# Altium PCB hexling_logic.PcbDoc
Units mil, origin at the board's own origin, x right, y up, seen from the top; angles counter-clockwise.
Board outline 1166 x 4200 mil, 2 copper layers (Top Layer, Bottom Layer), stack 62.086 mil thick; 49 components, 44 nets, 189 pads, 45 vias.
Unrouted connection lines stored in the file: 46.
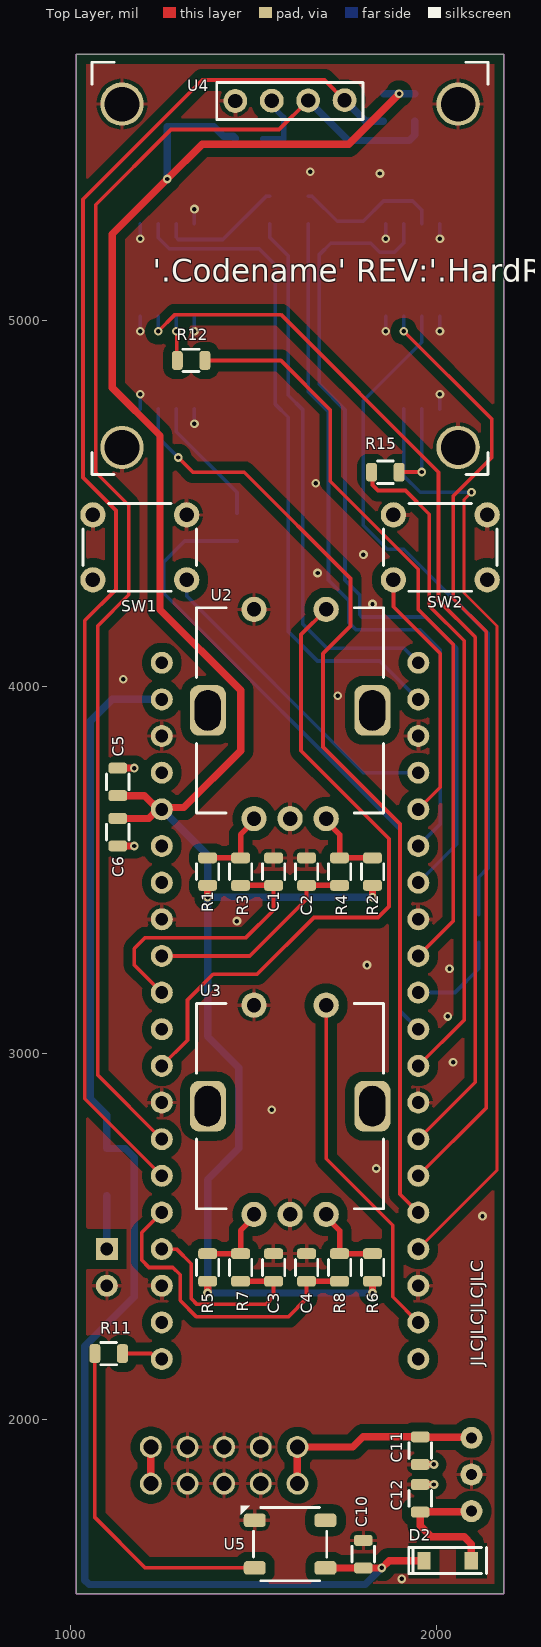
[diagram p0: Top Layer view]
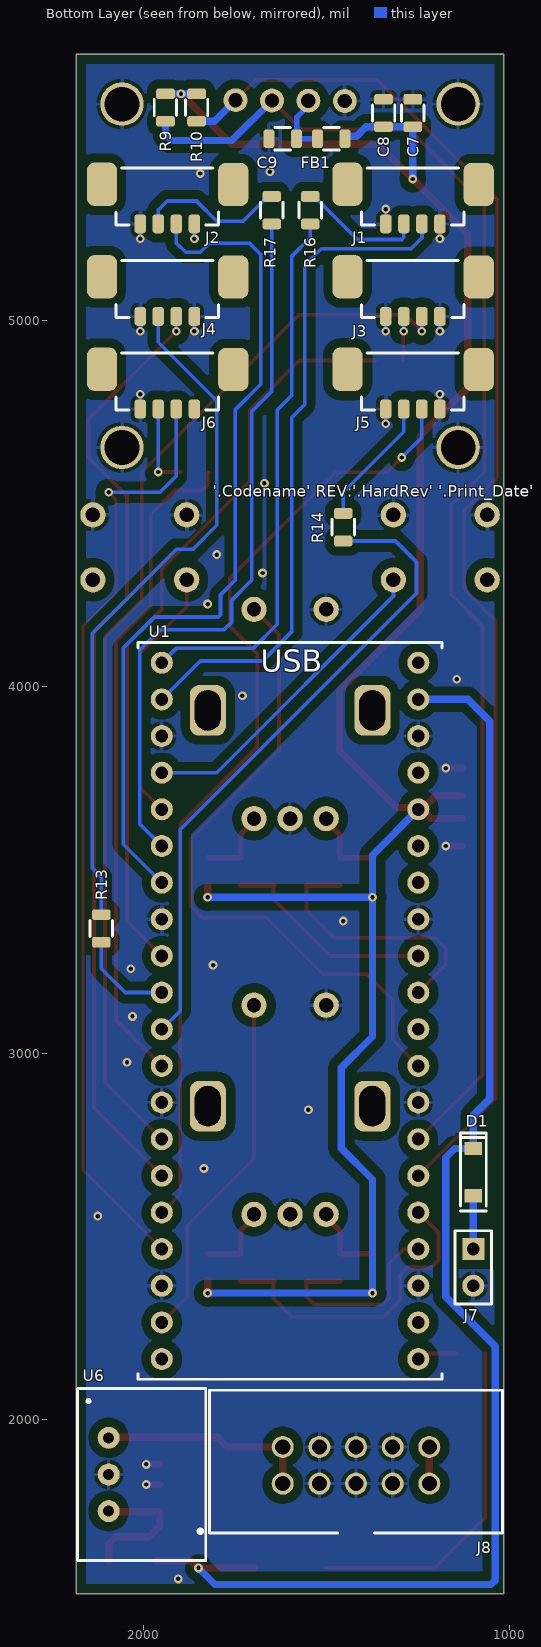
[diagram p1: Bottom Layer view, seen from below]
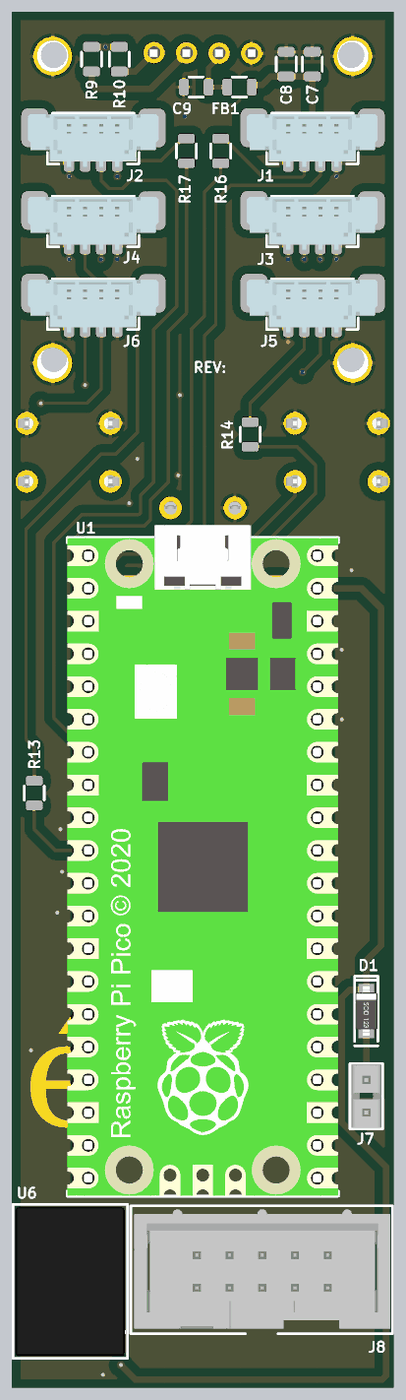
[diagram p2: 3D render of the assembled board from below, using the file's embedded part models]

## Layer stack, top to bottom
Top Solder: solder mask 0.4, Solder Resist, Dk 3.5
Top Layer: signal copper 1.4
Dielectric 1: dielectric 59.2858, FR-4, Dk 4.8
Bottom Layer: signal copper 1.4
Bottom Solder: solder mask 0.4, Solder Resist, Dk 3.5

## Board outline
1017,1525 2183,1525 2183,5725 1017,5725

## Design rules (kind name [scope] priority, off if disabled: settings)
Clearance Clearance_HS [InDifferentialPairClass('DIFF90') vs InPoly] p1: gap=75 ignorepadtopadclearanceinfootprint=FALSE
Clearance Clearance_Poly [All vs InPoly] p2: gap=25 ignorepadtopadclearanceinfootprint=FALSE
Clearance [All] p3: gap=5 ignorepadtopadclearanceinfootprint=FALSE
DiffPairsRouting DIff90 [InDifferentialPairClass('DIFF90')] p1: maxlimit=10 minlimit=7 mostfreqgap=7 toplayer_minwidth=15 toplayer_maxwidth=25 toplayer_prefwidth=25 bottomlayer_minwidth=15 bottomlayer_maxwidth=25 bottomlayer_prefwidth=25 maxuncoupledlength=75
DiffPairsRouting [All] p2: maxlimit=10 minlimit=10 mostfreqgap=10 toplayer_minwidth=15 toplayer_maxwidth=15 toplayer_prefwidth=15 bottomlayer_minwidth=15 bottomlayer_maxwidth=15 bottomlayer_prefwidth=15 maxuncoupledlength=500
Height [All] p1: minheight=0 maxheight=35835.32 prefheight=0
HoleSize [All] p1: absolutevalues=TRUE maxlimit=99999 minlimit=1 maxpercent=80.000 minpercent=20.000
MinimumSolderMaskSliver [All] p1: minsoldermaskwidth=1.8
PolygonConnect [InAnyComponent] p1: thpad.connectstyle=Relief thpad.reliefconductorwidth=10 thpad.reliefentries=4 thpad.polygonreliefangle="90 Angle" thpad.airgapwidth=10 smdpad.connectstyle=Relief smdpad.reliefconductorwidth=10 smdpad.reliefentries=4 smdpad.polygonreliefangle="90 Angle" smdpad.airgapwidth=10 via.connectstyle=Direct via.reliefconductorwidth=10 via.reliefentries=4 via.polygonreliefangle="90 Angle" via.airgapwidth=10
PolygonConnect "Fall through" [All] p2: connectstyle=Direct reliefconductorwidth=10 reliefentries=4 polygonreliefangle="90 Angle" airgapwidth=10
RoutingVias [All] p1: holewidth=28 width=50 viastyle="Through Hole" minholewidth=28 minwidth=50 maxholewidth=28 maxwidth=50
SilkToSilkClearance [All] p1: silktosilkclearance=0
SilkToSolderMaskClearance [IsPad] p1: minsilkscreentomaskgap=0 clearancetoexposedcopper=TRUE
SolderMaskExpansion [All] p1: expansion=2 istentingtop=FALSE
SupplyNets "Schematic Supply Nets_7" [InNet('VSYS')] p1: voltage=0.000
SupplyNets "Schematic Supply Nets_6" [InNet('-12V')] p2: voltage=0.000
SupplyNets "Schematic Supply Nets_5" [InNet('12V')] p3: voltage=0.000
SupplyNets "Schematic Supply Nets_3" [InNet('3.3V')] p4: voltage=0.000
SupplyNets "Schematic Supply Nets_2" [InNet('USB_VBUS')] p5: voltage=0.000
SupplyNets "Schematic Supply Nets_1" [InNet('GND')] p6: voltage=0.000
SupplyNets "Schematic Supply Nets" [InNet('ADC_VREF')] p7: voltage=0.000
Width [All] p1: maxlimit=300 minlimit=8 preferedwidth=10
24 further rules are at their usual default settings.

## Components (designator, comment, footprint, x,y, rotation, side; value= is the part's Value field where it differs from the comment)
C1 "10000pF" Chip0805 1555,3495 r270 top
C2 "10000pF" Chip0805 1645,3495 r270 top
C3 "10000pF" Chip0805 1555,2415 r270 top
C4 "10000pF" Chip0805 1645,2415 r270 top
C5 "0.1µF" Chip0805 1130,3740 r270 top
C6 "10µF" Chip0805 1130,3602.6 r90 top
C7 "10µF" Chip0805 1265,5565 r270 bottom
C8 "0.1µF" Chip0805 1345,5565 r270 bottom
C9 "0.1µF" Chip0805 1620,5495 r180 bottom
C10 "0.1µF" Chip0805 1800,1632.6 r270 top
C11 "10µF" Chip0805 1955,1915 r90 top
C12 "10µF" Chip0805 1955,1785 r270 top
D1 "1N4148W-7-F" SOD-123 1100,2675 r270 bottom
D2 "1N4148W-7-F" SOD-123 2030,1615 r0 top
FB1 "FERRITE" Chip0805 1487.6,5495 r0 bottom
J1 "0533980471" Molex_0533980471 1265,5330 r180 bottom
J2 "0533980471" Molex_0533980471 1935,5330 r180 bottom
J3 "0533980471" Molex_0533980471 1265,5077.5 r180 bottom
J4 "0533980471" Molex_0533980471 1935,5077.5 r180 bottom
J5 "0533980471" Molex_0533980471 1265,4825 r180 bottom
J6 "0533980471" Molex_0533980471 1935,4825 r180 bottom
J7 "3-644456-2" TE_3-644456-2 1100,2415 r270 bottom
J8 "75869-101LF" IDC_100_2x5 1420,1875 r180 bottom
M1 "JLC_NUMBER" JLC_NUMBER 2430,1980 r90 top
R1 "10k" Chip0805 1375,3495 r270 top
R2 "10k" Chip0805 1825,3495 r270 top
R3 "10k" Chip0805 1465,3495 r270 top
R4 "10k" Chip0805 1735,3495 r270 top
R5 "10k" Chip0805 1375,2415 r270 top
R6 "10k" Chip0805 1825,2415 r270 top
R7 "10k" Chip0805 1465,2415 r270 top
R8 "10k" Chip0805 1735,2415 r270 top
R9 "2.2k" Chip0805 1940,5580 r90 bottom
R10 "2.2k" Chip0805 1855,5580 r90 bottom
R11 "330" Chip0805 1105,2180 r180 top
R12 "330" Chip0805 1330,4890 r180 top
R13 "330" Chip0805 2115,3340 r90 bottom
R14 "330" Chip0805 1455,4435 r90 bottom
R15 "330" Chip0805 1860,4585 r0 top
R16 "330" Chip0805 1545,5300 r90 bottom
R17 "330" Chip0805 1650,5300 r90 bottom
SW1 "TL1105YF160Q" E-Switch_TL1105YF 1190,4380 r0 top
SW2 "TL1105YF160Q" E-Switch_TL1105YF 2010,4380 r0 top
U1 "SC0917" RASPBERRY_PI_PICO_H 1600,3115 r180 bottom locked
U2 "PEC11R-4020F-S0012" BOURNS_PEC11R-4020F-S 1600,3935 r0 top
U3 "PEC11R-4020F-S0012" BOURNS_PEC11R-4020F-S 1600,2855 r0 top
U4 "HS96L03W2C03" HS_HS96L03W2C03 1600,5203.6 r0 top locked
U5 "WS2812B-V5/W" WS2812B 1600,1660 r180 top
U6 "R-78E5.0-0.5" 3-SIP_Module 2095,1850 r270 bottom

## Footprints (in the part's own frame and the unit in brackets; to place one, negate y for a bottom-side part, rotate by r counter-clockwise, add the part's x,y. Pads: shape width x height; smd on the part's side, far side on the other; paste and mask are expansions set on the pad)
3-SIP_Module [mil]
  round 60 hole 30: 1(-100,0) 2(0,0) 3(100,0)
  silkscreen extent -235,-85 235,265, body extent -228,-78 228,257, height 410
BOURNS_PEC11R-4020F-S [mm]
  round 1.75 hole 1: 1(-2.5,7) 2(2.5,7) A(-2.5,-7.5) B(2.5,-7.5) C(0,-7.5)
  rrect50% 2.5x3.5 hole 1.8 slot 2.8 at 90 deg: 3(-5.7,0) 4(5.7,0)
  silkscreen extent -6.48,-7.11 6.48,7.11, body extent -7,-7.7 7,7.2, height 26.62
Chip0805 [mm] "Chip Resistor, 2-Leads, Body 2.05x1.25mm, IPC Medium Density"
  rrect50% 0.75x1.3 smd: 1(-0.955,0) 2(0.955,0)
  silkscreen extent -0.55,-0.77 0.55,0.77, body extent -0.95,-0.55 0.95,0.55, height 0.5
E-Switch_TL1105YF [mm]
  round 1.75 hole 1: 1(-3.25,-2.25) 2(3.25,-2.25) 3(-3.25,2.25) 4(3.25,2.25)
  silkscreen extent -3.94,-3.05 3.94,3.05, body extent -3.94,-3 3.94,3, height 16.32
HS_HS96L03W2C03 [mm]
  round 1.651 hole 0.991: 1(-3.795,10.015) 2(-1.27,10.033) 3(1.255,10.051) 4(3.779,10.068)
  round 3 hole 2.4: 5(-11.65,9.8) 6(11.65,9.8) 7(-11.65,-14) 8(11.65,-14)
  silkscreen extent -13.72,-15.88 13.72,12.7, body extent -13.34,-15.48 13.36,12.38, height 9.06
IDC_100_2x5 [mil]
  round 60 hole 41: 1(-200,-50) 2(-200,50) 3(-100,-50) 4(-100,50) 5(0,-50) 6(0,50) 7(100,-50) 8(100,50) 9(200,-50) 10(200,50)
  silkscreen extent -430,-185 400,205, body extent -390,-170 394,195, height 367
JLC_NUMBER [mil]
Molex_0533980471 [mm]
  rrect50% 2.1x3 smd: 0(-4.525,1.035) 0(4.572,1.016)
  rrect50% 0.8x1.3 smd: 1(-1.875,-1.714) 2(-0.625,-1.714) 3(0.625,-1.714) 4(1.875,-1.715)
  silkscreen extent -3.56,-1.78 3.56,2.16, body extent -5.07,-2.1 5.07,2.1, height 4.71
RASPBERRY_PI_PICO_H [mil]
  round 60 hole 35: 1(-350,950) 2(-350,850) 3(-350,750) 4(-350,650) 5(-350,550) 6(-350,450) 7(-350,350) 8(-350,250) 9(-350,150) 10(-350,50) 11(-350,-50) 12(-350,-150) 13(-350,-250) 14(-350,-350) 15(-350,-450) 16(-350,-550) 17(-350,-650) 18(-350,-750) 19(-350,-850) 20(-350,-950) 21(350,-950) 22(350,-850) 23(350,-750) 24(350,-650) 25(350,-550) 26(350,-450) 27(350,-350) 28(350,-250) 29(350,-150) 30(350,-50) 31(350,50) 32(350,150) 33(350,250) 34(350,350) 35(350,450) 36(350,550) 37(350,650) 38(350,750) 39(350,850) 40(350,950)
  silkscreen extent -415,-1005 415,1005, body extent -413,-1004 413,1043, height 418
SOD-123 [mm] "SOD123"
  rect 0.91x1.22 smd: 1(-1.64,0) 2(1.64,0)
  silkscreen extent -2.7,-0.9 2.7,0.9, body extent -1.92,-0.85 1.92,0.85, height 1.43
TE_3-644456-2 [mil]
  rect 60x60 hole 35: 1(-50,0)
  round 60 hole 35: 2(50,0)
  silkscreen extent -100,-50 100,50, body extent -94,-46 94,46, height 395
WS2812B [mil]
  rrect50% 60x37 smd: 1(-96.46,64.96) 2(-96.46,-64.96) 3(96.46,-64.96) 4(96.46,64.96)
  silkscreen extent -100,-105 135,100, body extent -106,-98 106,98, height 62

## Part data
C1 C2 C3 C4: library part C2012X7R2E103M125AE, "CAP CER 10000PF 250V X7R 0805", Manufacturer="TDK Corporation", Operating Temperature="-55°C ~ 125°C", Package / Case="0805 (2012 Metric)", Ratings=-, Supplier Part Number 1=445-6805-1-ND, Temperature Coefficient=X7R, Tolerance=±20%, Voltage=250V, Applications="Boardflex Sensitive", Capacitance=10000pF, Features="Soft Termination", Height - Seated (Max)=-, helpURL=http://product.tdk.com/capacitor/mlcc/en/documents/mlcc_commercial_soft_en.pdf, Lead Spacing=-, Lead Style=-, Manufacturer Part Number=C2012X7R2E103M125AE, Mounting Type="Surface Mount, MLCC", PartNumber=C2012X7R2E103M125AE, Series=C, Size / Dimension="0.079\" L x 0.049\" W (2.00mm x 1.25mm)", Supplier 1=Digi-Key, Supplier 2=Mouser, Thickness (Max)="0.057\" (1.45mm)"
C5 C8 C9 C10: library part C2012X7T2E104K125AA, "CAP CER 0.1UF 250V 10% X7T 0805", Manufacturer="TDK Corporation", Operating Temperature="-55°C ~ 125°C", Package / Case="0805 (2012 Metric)", Ratings=-, Supplier Part Number 1=445-7749-1-ND, Temperature Coefficient=X7T, Tolerance=±10%, Voltage=250V, Applications="General Purpose", Capacitance=0.1µF, Features=-, Height - Seated (Max)=-, helpURL=http://product.tdk.com/capacitor/mlcc/en/documents/mlcc_commercial_midvoltage_en.pdf, Lead Spacing=-, Lead Style=-, Manufacturer Part Number=C2012X7T2E104K125AA, Mounting Type="Surface Mount, MLCC", PartNumber=C2012X7T2E104K125AA, Series=C, Size / Dimension="0.079\" L x 0.049\" W (2.00mm x 1.25mm)", Supplier 1=Digi-Key, Supplier 2=Mouser, Thickness (Max)="0.057\" (1.45mm)"
C6 C7 C11 C12: library part C2012X5R1C106K125AC, "CAP CER 10UF 16V 10% X5R 0805", Manufacturer="TDK Corporation", Operating Temperature="-55°C ~ 85°C", Package / Case="0805 (2012 Metric)", Ratings=-, Supplier Part Number 1=445-7646-1-ND, Temperature Coefficient=X5R, Tolerance=±10%, Voltage=16V, Applications="General Purpose", Capacitance=10µF, Features=-, Height - Seated (Max)=-, helpURL=http://product.tdk.com/capacitor/mlcc/en/documents/mlcc_commercial_general_en.pdf, Lead Spacing=-, Lead Style=-, Manufacturer Part Number=C2012X5R1C106K125AC, Mounting Type="Surface Mount, MLCC", PartNumber=C2012X5R1C106K125AC, Series=C, Size / Dimension="0.079\" L x 0.049\" W (2.00mm x 1.25mm)", Supplier 1=Digi-Key, Supplier 2=Mouser, Thickness (Max)="0.057\" (1.45mm)"
D1 D2: "DIODE SWITCH 100V 0.15A SOD123", Capacitance @ Vr, F="2pF @ 0V, 1MHz", Current - Average Rectified (Io)=150mA, Current - Reverse Leakage @ Vr="1µA @ 75V", Manufacturer="Diodes Incorporated", Operating Temperature - Junction="-65°C ~ 150°C", Package / Case=SOD-123, Supplier Part Number 1=1N4148W-FDICT-ND, Voltage - DC Reverse (Vr) (Max)=100V, Voltage - Forward (Vf) (Max) @ If="1.25V @ 150mA", Datasheets=http://www.diodes.com/datasheets/ds30086.pdf, Diode Type=Standard, Manufacturer Part Number=1N4148W-7-F, Mounting Type="Surface Mount", PartNumber=1N4148W-7-F, Reverse Recovery Time (trr)=4ns, Series=0, Speed="Small Signal =< 200mA (Io), Any Speed", Supplier 1=Digi-Key, Supplier Device Package=SOD-123
FB1: library part 74279205, "FERRITE BEAD 1000 OHM .20A 0805", Current Rating=200mA, DC Resistance (DCR)="450 mOhm Max", Impedance @ Frequency="1 kOhm @ 100MHz", Manufacturer="Wurth Electronics Inc", Package / Case="0805 (2012 Metric)", Supplier Part Number 1=732-1606-1-ND, Filter Type="Differential Mode - Single", Height (Max)="0.043\" (1.10mm)", helpURL=http://katalog.we-online.de/pbs/datasheet/74279205.pdf, Manufacturer Part Number=74279205, Mounting Type="Surface Mount", PartNumber=74279205, Series=WE-CBF, Size / Dimension="0.079\" L x 0.047\" W (2.00mm x 1.20mm)", Supplier 1=Digi-Key
J1 J2 J3 J4 J5 J6: "CONN HEADER SMD 4POS 1.25MM", Manufacturer=Molex, Supplier Part Number 1=WM7608CT-ND, helpURL=https://www.molex.com/pdm_docs/sd/533980471_sd.pdf, Manufacturer Part Number=0533980471, PartNumber=0533980471, Supplier 1=Digi-Key, Supplier 2=Mouser, Supplier 21=LCSC, Supplier Part Number 2=538-53398-0471, Supplier Part Number 3=C234195
J7: "CONN HEADER VERT 2POS .100 TIN", Manufacturer="TE Connectivity", Supplier Part Number 1=A31112-ND, helpURL=http://www.te.com/commerce/DocumentDelivery/DDEController?Action=srchrtrv&DocNm=644456&DocType=Customer+Drawing&DocLang=English, Manufacturer Part Number=3-644456-2, PartNumber=3-644456-2, Supplier 1=Digi-Key, Supplier 2=Mouser, Supplier Part Number 2=571-3-644456-2
J8: "CONN HEADER 10POS DUAL VERT PCB", Manufacturer=FCI, Supplier Part Number 1=609-1774-ND, helpURL=http://portal.fciconnect.com/Comergent//fci/drawing/75869.pdf, Manufacturer Part Number=75869-101LF, PartNumber=75869-101LF, Supplier 1=Digi-Key, Supplier 2=Mouser, Supplier Part Number 2=649-75869-101LF
M1: "JLC Order Number Location", Manufacturer Part Number=JLC_NUMBER, PartNumber=JLC_NUMBER
R1 R2 R3 R4 R5 R6 R7 R8: library part CRCW080510K0FKEA, "RES 10.0K OHM 1/8W 1% 0805 SMD", Manufacturer="Vishay Dale", Package / Case="0805 (2012 Metric)", Power (Watts)="0.125W, 1/8W", Supplier Part Number 1=541-10.0KCCT-ND, Temperature Coefficient=±100ppm/°C, Tolerance=±1%, Composition="Thick Film", Features="Automotive AEC-Q200 Qualified", Height="0.020\" (0.50mm)", helpURL=http://www.vishay.com/doc?20035, Manufacturer Part Number=CRCW080510K0FKEA, Number of Terminations=2, PartNumber=CRCW080510K0FKEA, Resistance=10k, Series=CRCW, Size / Dimension="0.079\" L x 0.049\" W (2.00mm x 1.25mm)", Supplier 1=Digi-Key, Supplier 2=Mouser, Supplier Device Package="0805 (2012 Metric)"
R9 R10: library part CRCW08052K20FKEA, "RES 2.20K OHM 1/8W 1% 0805 SMD", Manufacturer="Vishay Dale", Package / Case="0805 (2012 Metric)", Power (Watts)="0.125W, 1/8W", Supplier Part Number 1=541-2.20KCCT-ND, Temperature Coefficient=±100ppm/°C, Tolerance=±1%, Composition="Thick Film", Features="Automotive AEC-Q200 Qualified", Height="0.020\" (0.50mm)", helpURL=http://www.vishay.com/doc?20035, Manufacturer Part Number=CRCW08052K20FKEA, Number of Terminations=2, PartNumber=CRCW08052K20FKEA, Resistance=2.2k, Series=CRCW, Size / Dimension="0.079\" L x 0.049\" W (2.00mm x 1.25mm)", Supplier 1=Digi-Key, Supplier 2=Mouser, Supplier Device Package="0805 (2012 Metric)"
R11 R12 R13 R14 R15 R16 R17: library part CRCW0805330RFKEA, "RES 330 OHM 1/8W 1% 0805 SMD", Manufacturer="Vishay Dale", Package / Case="0805 (2012 Metric)", Power (Watts)="0.125W, 1/8W", Supplier Part Number 1=541-330CCT-ND, Temperature Coefficient=±100ppm/°C, Tolerance=±1%, Composition="Thick Film", Features="Automotive AEC-Q200 Qualified", Height="0.020\" (0.50mm)", helpURL=http://www.vishay.com/doc?20035, Manufacturer Part Number=CRCW0805330RFKEA, Number of Terminations=2, PartNumber=CRCW0805330RFKEA, Resistance=330, Series=CRCW, Size / Dimension="0.079\" L x 0.049\" W (2.00mm x 1.25mm)", Supplier 1=Digi-Key, Supplier 2=Mouser, Supplier Device Package="0805 (2012 Metric)"
SW1 SW2: "SWITCH TACTILE SPST-NO 0.05A 12V", Manufacturer=E-Switch, Supplier Part Number 1=EG5455-ND, helpURL=https://configured-product-images.s3.amazonaws.com/Datasheets/TL1105.pdf, Manufacturer Part Number=TL1105YF160Q, PartNumber=TL1105YF160Q, Supplier 1=Digi-Key, Supplier 2=Mouser, Supplier 3=LCSC, Supplier Part Number 2=612-TL1105YF160Q, Supplier Part Number 3=C4364602
U1: "RASPBERRY PI PICO H", Manufacturer="Raspberry Pi", Supplier Part Number 1=2648-SC0917-ND, Manufacturer Part Number=SC0917, PartNumber=SC0917, Supplier 1=Digi-Key
U2 U3: "ROTARY ENCODER MECHANICAL 12PPR", Manufacturer="Bourns Inc.", Supplier Part Number 1=PEC11R-4020F-S0012-ND, Datasheets=https://www.bourns.com/docs/Product-Datasheets/PEC11R.pdf, Manufacturer Part Number=PEC11R-4020F-S0012, PartNumber=PEC11R-4020F-S0012, Supplier 1=Digi-Key, Supplier 2=Mouser, Supplier Part Number 2=652-PEC11R-4020F-S12
U4: "0.96\" I2C OLED MODULE", Manufacturer=HS, Manufacturer Part Number=HS96L03W2C03, PartNumber=HS96L03W2C03, Supplier 3=LCSC, Supplier Part Number 3=C5248080
U5: "Addressable RGB LED", Manufacturer=Worldsemi, Supplier Part Number 1=1568-COM-16347CT-ND, Datasheets=https://www.peace-corp.co.jp/data/WS2812B-V5_V1.0_EN.pdf, Manufacturer Part Number=WS2812B-V5/W, PartNumber=WS2812B-V5/W, Supplier 1=Digi-Key, Supplier 2=Mouser, Supplier 3=LCSC, Supplier Part Number 2=474-COM-24837, Supplier Part Number 3=C2874885
U6: "DC DC CONVERTER 5V 3W", Manufacturer="Recom Power", Supplier Part Number 1=945-1648-5-ND, helpURL=https://recom-power.com/pdf/Innoline/R-78E-0.5.pdf, Manufacturer Part Number=R-78E5.0-0.5, PartNumber=R-78E5.0-0.5, Supplier 1=Digi-Key, Supplier 2=Mouser, Supplier 3=LCSC, Supplier Part Number 2=919-R-78E5.0-0.5, Supplier Part Number 21=C5199916

## Via types
v1: diameter 24, hole 12, Top Layer to Bottom Layer, tented both sides, 45 vias

## Nets (pads, with @x,y where several pads share a name; then routed paths per layer and width w, separated by ;. In a path a pad name is that pad's centre, name@x,y a point inside that pad or via, vN(x,y) a via of type N, cw(c..) or ccw(c..) an arc to the next point about the centre after c; other vN are vias at no path point)
3.3_OLED: C9.2 FB1.2 U4.2 | length 174.2
  Bottom Layer w15: FB1.2 C9.2 1582.4,5553.22 1550,5585.63 U4.2
3.3V: C5.2 C6.2 C7.2 C8.2 FB1.1 R1.2 R2.2 R5.2 R6.2 R9.2 R10.2 U1.36 | length 5931.7
  Top Layer w20: C6.2 1214.37,3640.2 1239.18,3665 U1.36@1239.95,3665 ; C5.2 1202.55,3702.4 U1.36@1239.95,3665 ; v1(1375,2345) R5.2 ; v1(1375,3425) R1.2 ; v1(1825,2345) R6.2 ; v1(1825,3425) R2.2 ; v1(1897.5,5617.6) 1759.9,5480 1360,5480 v1(1265,5385) 1115,5235 1115,4815 1245,4685 1245,4210 1465,3990 1465,3825 1310,3670 1255,3670 U1.36 U1.36@1239.95,3665
  Bottom Layer w20: U1.36 1375,3540 v1(1375,3425) ; v1(1265,5385) C7.2 C8.2 1392.6,5527.4 1418.27,5501.73 1445.24,5501.73 1450,5496.96 FB1.1 ; v1(1825,2345) v1(1375,2345) 1375,2655 1460,2740 1460,2960 1375,3045 v1(1375,3425) ; v1(1825,3425) v1(1375,3425) ; R10.2 v1(1897.5,5617.6) R9.2
12V: C11.2 J8.1 J8.2 U6.1 | length 587.5
  Top Layer w20: J8.1 J8.2 1771.32,1925 1798.92,1952.6 C11.2 1956.3,1951.3 2093.7,1951.3 U6.1
-12V: J8.9 J8.10 | length 100
  Top Layer w20: J8.9 J8.10
ADC_VREF: U1.35
ENC0_A: C1.2 R3.2 U1.31 | length 732
  Top Layer w10: U1.31 1175,3240 1175,3285 1205,3315 1480,3315 1555,3390 C1.2
  Top Layer w15: R3.2 C1.2
ENC0_B: C2.2 R4.2 U1.32 | length 586.6
  Top Layer w10: U1.32 1490,3265 1645,3420 C2.2
  Top Layer w15: C2.2 R4.2
ENC0_SW: U1.29 U2.2 | length 1803
  Top Layer w10: U1.29 1320,3035 1320,3145 1390,3215 1510,3215 1665,3370 1840,3370 1870,3400 1870,3585 1630,3825 1630,4142.17 U2.2
ENC1_A: C3.2 R7.2 U1.24 | length 564.2
  Top Layer w10: U1.24 1290,2465 1330,2425 1330,2330 1345.86,2314.14 1534.14,2314.14 1555,2335 C3.2
  Top Layer w15: R7.2 C3.2
ENC1_B: C4.2 R8.2 U1.25 | length 866.1
  Top Layer w10: U1.25 1195,2510 1195,2435 1215,2415 1280,2415 1300,2395 1300,2325 1345,2280 1595,2280 1645,2330 C4.2
  Top Layer w15: C4.2 R8.2
ENC1_SW: U1.19 U3.2 | length 969.8
  Top Layer w10: U3.2 1698.43,2711.57 1880,2530 1880,2335 U1.19
GND: C1.1 C2.1 C3.1 C4.1 C5.1 C6.1 C7.1 C8.1 C9.1 C10.1 C11.1 C12.1 J1.1 J1.4 J2.1 J2.4 J3.1 J3.4 J4.1 J4.4 J5.1 J5.4 J6.1 J6.4 J7.2 J8.3 J8.4 J8.5 J8.6 J8.7 J8.8 SW1.3 SW1.4 SW2.3 SW2.4 U1.3 U1.8 U1.13 U1.18 U1.23 U1.28 U1.33 U1.38 U2.1 U2.C U3.1 U3.C U4.1 U4.5 U4.6 U4.7 U4.8 U5.3 U6.2 | length 609.5
  Top Layer w18: C12.1 v1(1992.6,1822.6) ; C11.1 v1(1992.6,1877.4)
  Top Layer w20: C6.1 v1(1175,3565) ; C5.1 v1(1175,3777.6)
  Bottom Layer w10: J5.4 v1(1191.18,4797.89) ; v1(1191.18,4969.61) J3.4 ; v1(1191.18,5222.11) J1.4 ; v1(1338.82,4717.11) J5.1 ; v1(1338.82,4969.61) J3.1 ; J1.1 v1(1338.82,5302.89) ; v1(1861.18,4969.61) J4.4 ; v1(1861.18,5222.11) J2.4 ; J6.1 v1(2008.82,4797.89) ; v1(2008.82,4969.61) J4.1 ; v1(2008.82,5222.11) J2.1
  other v1: 1905,1565 2125,2555 1835,2685 1550,2845 2045,2975 2030,3100 2035,3230 1810,3240 1455,3360 1730,3975 1145,4020 1825,4225 1675,4310 1800,4360 1670,4555 1845,5400 1655,5405
I2C0_SCL: R9.1 U1.27 U4.3 | length 3771.6
  Top Layer w10: U1.27 1075,2940 1075,4165.5 1160,4250.5 1160,4495 1070,4585 1070,5315 1275,5520 1570.09,5520 U4.3
  Bottom Layer w20: U4.3 1758.7,5490 1925,5490 1940,5505 R9.1
I2C0_SDA: R10.1 U1.26 U4.4 | length 3827.3
  Top Layer w10: U1.26 1040,2875 1040,4180 1125,4265 1125,4480.5 1035,4570.5 1035,5329.5 1360.5,5655 1693.79,5655 U4.4
  Bottom Layer w10: U1.26@1248.7,2666.3 U1.26
  Bottom Layer w20: U4.4 1806.39,5542.4 R10.1
LED_DATA: R11.2 U5.4 | length 940.5
  Top Layer w10: R11.2 1067.4,1732.6 1204.96,1595.04 U5.4
NetC12_2: C12.2 D2.2 U6.3 | length 384
  Top Layer w20: D2.2 2094.57,1660.43 2075,1680 1985,1680 1955,1710 C12.2 1956.3,1748.7 2093.7,1748.7 U6.3
NetD1_2: D1.2 J7.1 | length 145.4
  Bottom Layer w20: J7.1 D1.2
NetR1_1: R1.1 R3.1 U2.A | length 212.3
  Top Layer w15: R1.1 R3.1 1465,3595.76 1501.57,3632.34 U2.A
NetR2_1: R2.1 R4.1 U2.B | length 212.3
  Top Layer w15: U2.B 1698.43,3632.34 1735,3595.76 R4.1 R2.1
NetR5_1: R5.1 R7.1 U3.A | length 212.3
  Top Layer w15: R5.1 R7.1 1465,2515.76 1501.57,2552.34 U3.A
NetR6_1: R6.1 R8.1 U3.B | length 212.3
  Top Layer w15: U3.B 1698.43,2552.34 1735,2515.76 R8.1 R6.1
NetR11_1: R11.1 U1.21 | length 113.6
  Top Layer w10: R11.1 1221.47,2180 1236.47,2165 U1.21
NetR12_1: R12.1 U1.9 | length 2066.4
  Top Layer w10: R12.1 1575,4890 1710,4755 1710,4560 1950,4320 1950,4210 2045,4115 2045,3360 U1.9
NetR13_1: R13.1 U1.10 | length 264.3
  Bottom Layer w10: U1.10 2050,3165 2115,3230 R13.1
NetR14_1: R14.1 U1.11 | length 1786.7
  Bottom Layer w10: R14.1 1312.4,4397.4 1255,4340 1255,4255 1900,3610 1900,3115 U1.11
NetR15_1: R15.1 U1.12 | length 1820.3
  Top Layer w10: R15.1 1824.73,4582.67 1824.73,4550.27 1840,4535 1915,4535 1980,4470 1980,4220 2075,4125 2075,3090 U1.12
NetR16_1: R16.1 U1.1 | length 1488.2
  Bottom Layer w10: R16.1 1545,5225 1595,5175 1595,4795 1635,4755 1635,4170 1700,4105 1910,4105 U1.1
NetR17_1: R17.1 U1.6 | length 1973.9
  Bottom Layer w10: R17.1 1650,4805 1705,4750 1705,4290 1760,4235 1760,4175 1780,4155 1955,4155 2010,4100 2010,3625 U1.6
SW1: SW1.2 U1.4 | length 876.1
  Bottom Layer w10: SW1.2 1317.95,4247.05 1800,3765 U1.4
SW2: SW2.1 U1.5 | length 704.3
  Top Layer w10: SW2.1 1882.05,4217.95 2010,4090 2010,3725 U1.5
UART0_RX: J1.3 U1.2 | length 1834.9
  Bottom Layer w10: J1.3 1240,5262.11 1240,5225 1270,5195 1515,5195 1560,5150 1560,4770 1595,4735 1595,4150 1675,4070 1845,4070 U1.2
UART0_TX: J1.2 R16.2 | length 343.2
  Bottom Layer w10: J1.2 1289.61,5225.86 1295.46,5220 1416.57,5220 1534.17,5337.6 R16.2
UART1_RX: J2.3 U1.7 | length 2331.1
  Bottom Layer w10: J2.3 1910.39,5210.39 1885,5185 1845,5185 1820,5210 1710.86,5210 1680,5179.14 1680,4825 1750,4755 1750,4290 1790,4250 1790,4195.86 1795.86,4190 1970,4190 2055,4105 2055,3570 U1.7
UART1_TX: J2.2 R17.2 | length 408.5
  Bottom Layer w10: R17.2 1660.83,5337.6 1728.43,5270 1800,5270 1855,5325 1935,5325 1959.61,5300.39 J2.2
UART2_RX: J3.3 U1.14 | length 2927.5
  Top Layer w10: v1(1240.39,4969.61) 1285.79,5015 1575,5015 2005,4585 2005,4235 2105,4135 2105,2920 U1.14
  Bottom Layer w10: v1(1240.39,4969.61) J3.3
UART2_TX: J3.2 R12.2 | length 121.2
  Top Layer w10: v1(1289.61,4969.61) 1291,4968.21 1291,4891.4 R12.2
  Bottom Layer w10: v1(1289.61,4969.61) J3.2
UART3_RX: J4.3 U1.15 | length 2601.6
  Top Layer w10: v1(1910.39,4969.61) 2150,4730 2150,4625 2045,4520 2045,4240 2135,4150 2135,2850 U1.15
  Bottom Layer w10: v1(1910.39,4969.61) J4.3
UART3_TX: J4.2 R13.2 | length 1876.1
  Bottom Layer w10: J4.2 1959.61,4939.61 1800,4780 1800,4440 1865,4375 1910,4375 2140,4145 2140,3505 2115,3480 R13.2
UART4_RX: J5.3 U1.16 | length 2630.6
  Top Layer w10: v1(1295,4625) 1335,4585 1475,4585 1765,4295 1765,4165 1690,4090 1690,3835 1900,3625 1900,2615 U1.16
  Bottom Layer w10: J5.3 1240.39,4679.61 v1(1295,4625)
UART4_TX: J5.2 R14.2 | length 353.4
  Bottom Layer w10: J5.2 1289.61,4695.39 1455,4530 R14.2
UART5_RX: J6.3 U1.17 | length 2585.6
  Top Layer w8: U1.17 2165,2680 2165,4165 2075,4255 2075,4510 v1(2095,4530)
  Bottom Layer w10: J6.3 1910.39,4574.61 1955,4530 v1(2095,4530)
UART5_TX: J6.2 R15.2 | length 234.3
  Top Layer w10: R15.2 1897.99,4585.39 v1(1959.61,4585.39)
  Bottom Layer w10: v1(1959.61,4585.39) J6.2
USB_VBUS: U1.40
VSYS: C10.2 D1.1 D2.1 U1.39 U5.1 | length 3809.1
  Top Layer w20: U5.1 C10.2 v1(1850,1595) 1851.08,1595 1871.08,1615 D2.1
  Bottom Layer w20: U1.39 1115,3965 1055,3905 1055,2875 1100,2830 D1.1 1150.43,2739.57 1175,2715 1175,2335 1040,2200 1040,1561.72 1051.72,1550 1805,1550 v1(1850,1595)
pads on no net: J1.0 J2.0 J3.0 J4.0 J5.0 J6.0 SW1.1 SW2.2 U1.20 U1.22 U1.30 U1.34 U1.37 U2.3 U2.4 U3.3 U3.4 U5.2

## Polygon pours and split planes (outlines as drawn)
GND on Top Layer "GND_L01_P000" (solid, remove dead copper, pour order 0): 1015,5725 2185,5725 2185,1525 1010,1525
GND on Bottom Layer "GND_L02_P001" (solid, remove dead copper, pour order 1): 1015,5725 2185,5725 2185,1525 1010,1525

## Keep-outs
Keep-Out Layer:
  the board outline again, w1.97

## Silkscreen, mask and mechanical layers (free items; w line width, h text height)
Top Overlay:
  text "'.Codename' REV:'.HardRev' '.Print_Date'" at 1225,5105 h62
Bottom Overlay:
  text "'.Codename' REV:'.HardRev' '.Print_Date'" at 1810.86,4517.34 h31
Top Solder:
  text "é" at 1360,1995 h650
Bottom Solder:
  text "é" at 2150,2325 h650
Mechanical 1:
  the board outline again, w1.97
Top Courtyard:
  lines w1.97: 1000,1000 1000,6250 2200,6250 2200,1000 1000,1000 ; 1007,1080 2193,1080 2193,6140 1007,6140 1007,1080 ; 1017,1525 2183,1525 2183,5725 1017,5725 1017,1525

## Text inside footprints (layer, text, board x,y; h text height)
M1: Top Overlay "JLCJLCJLCJLC" at 2127.13,2144.85 h33.46 r90
U1: Bottom Overlay "USB" at 1679.97,4040 h60